# Altium PCB UI_PCB.PcbDoc (part 2 of 5)
Units mm, origin at the board's own origin, x right, y up, seen from the top; angles counter-clockwise.
Board outline 164.97 x 129.99 mm, 4 copper layers (SIG/PWR1, GND1, GNS2, SIG/PWR2), stack 1.18 mm thick; 237 components, 216 nets, 913 pads, 655 vias.
Unrouted connection lines stored in the file: 177.
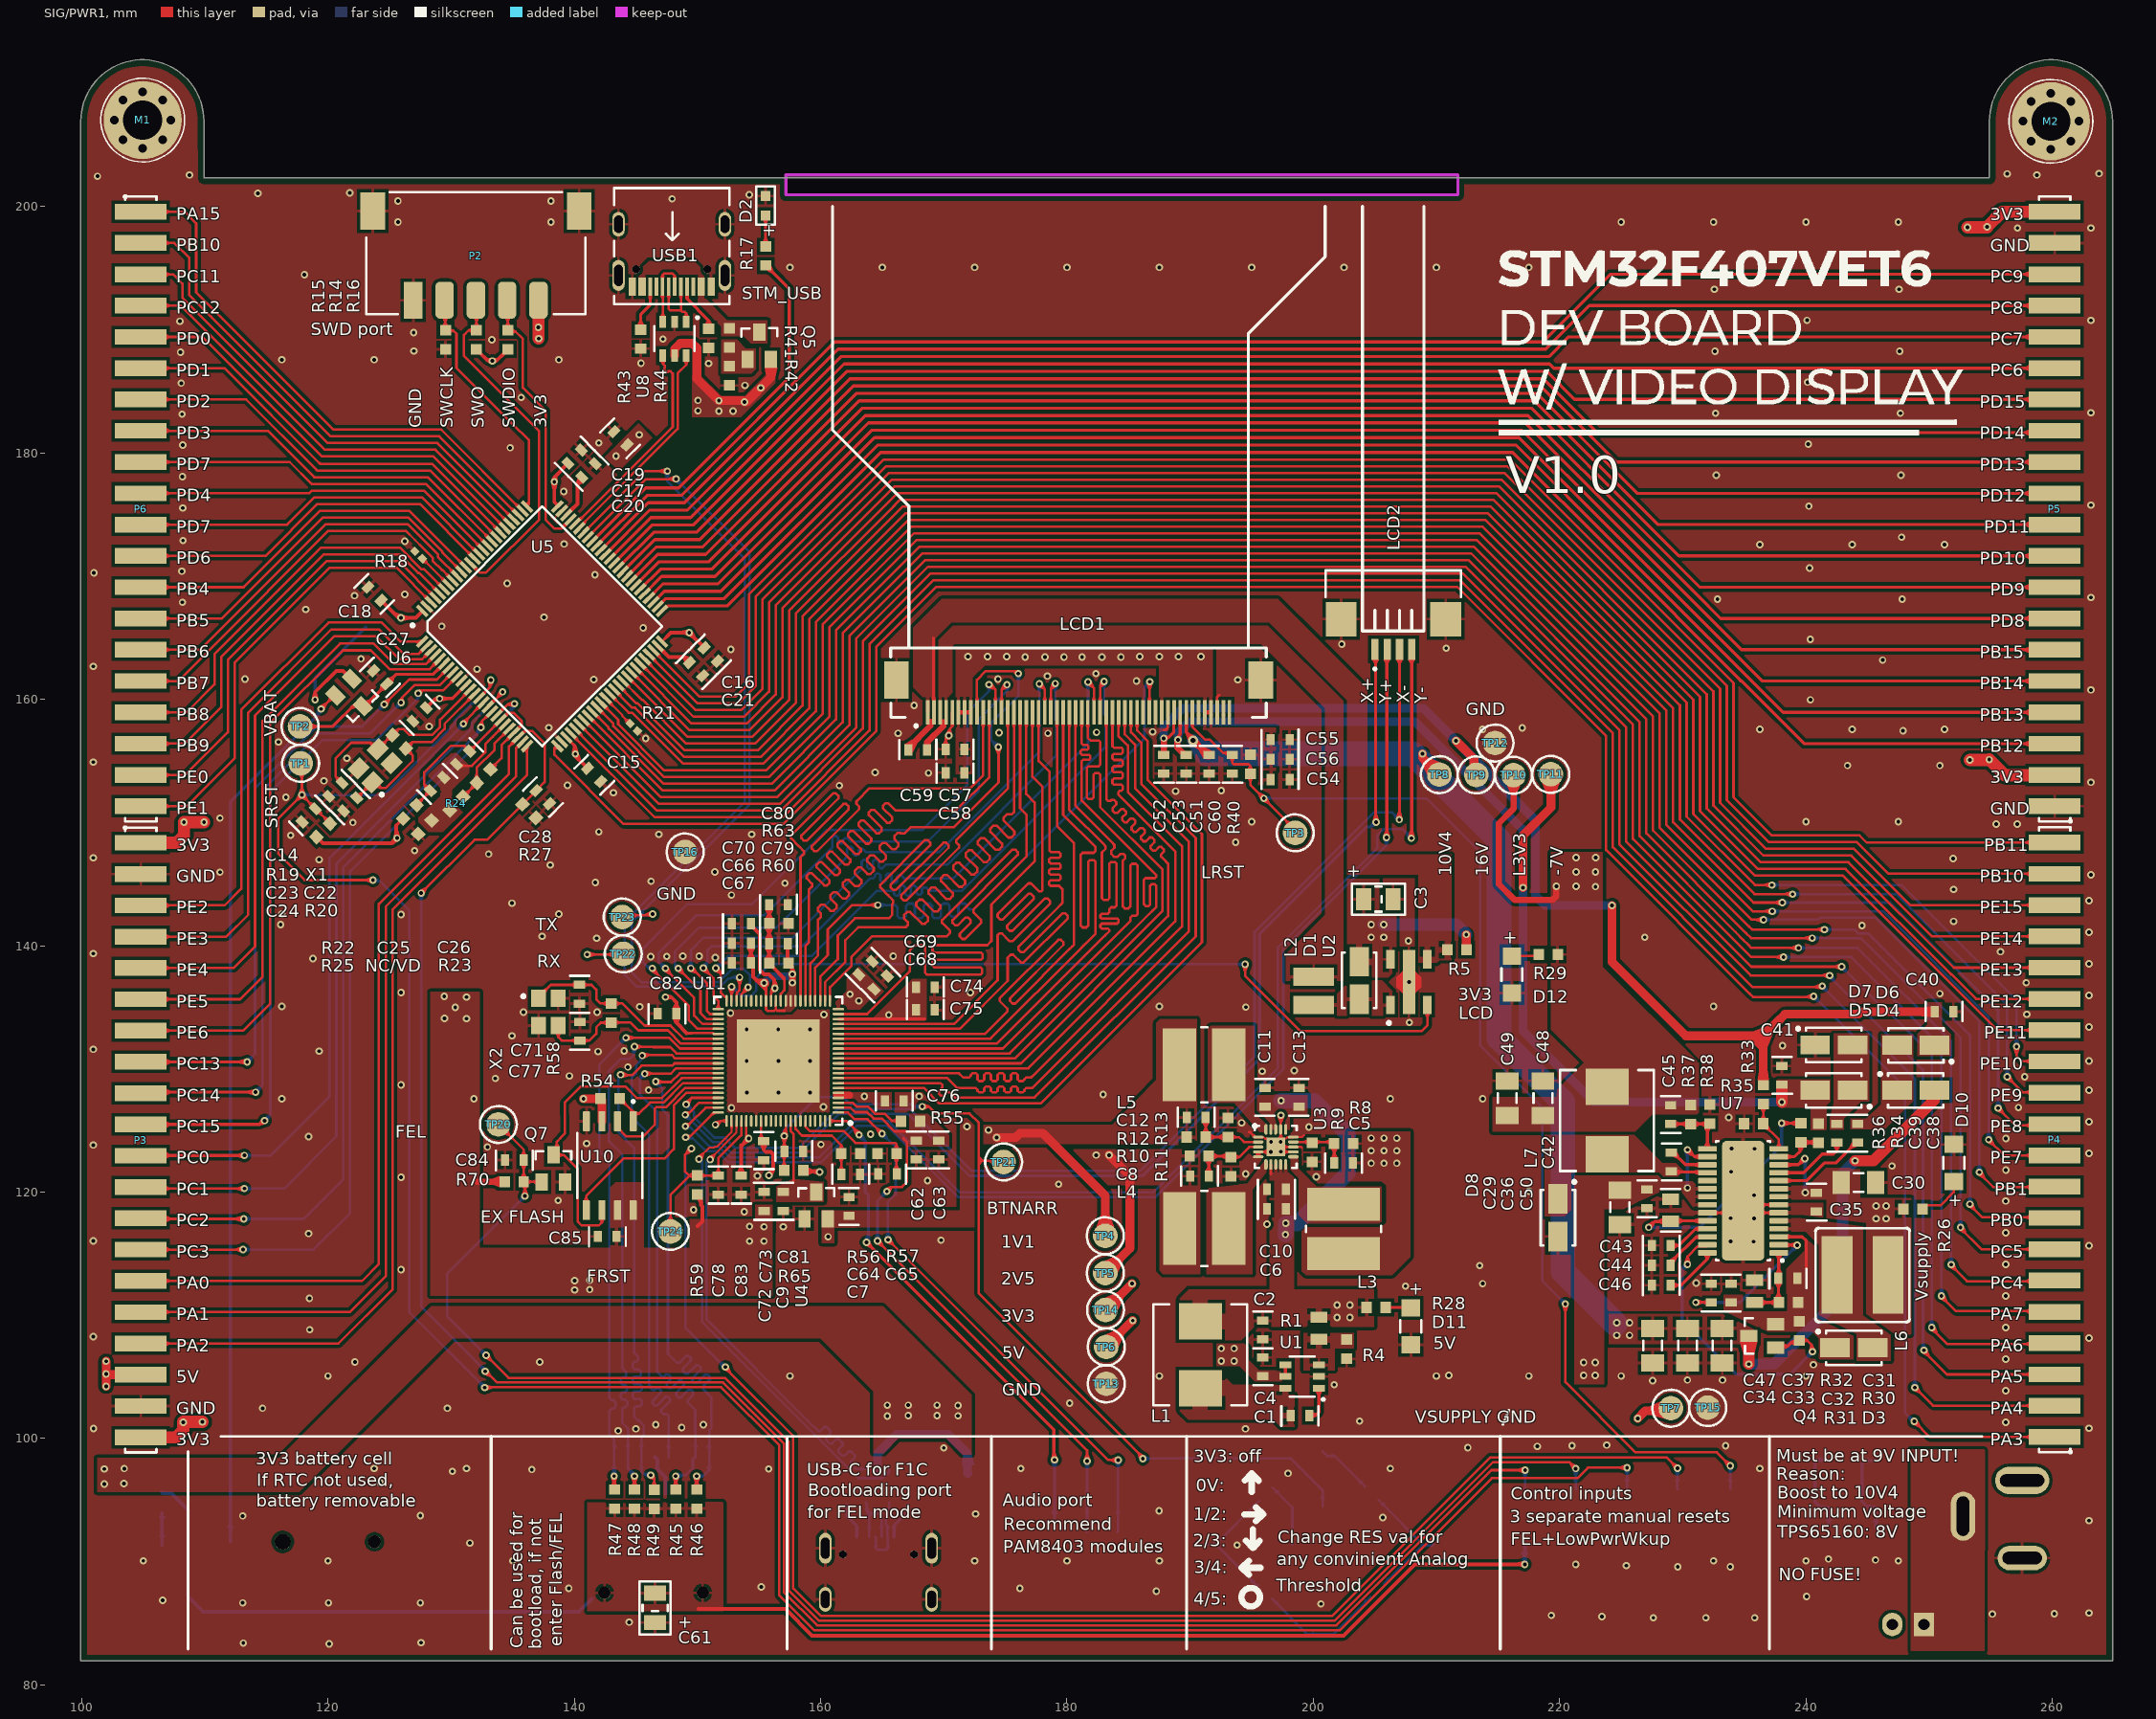
[diagram p0: SIG/PWR1 view]

## Via types
v1: diameter 0.6, hole 0.3, SIG/PWR1 to SIG/PWR2, tented both sides, 644 vias
v2: diameter 0.6, hole 0.3, SIG/PWR1 to SIG/PWR2, tented bottom, 10 vias
v3: diameter 0.8, hole 0.4, SIG/PWR1 to SIG/PWR2, tented both sides, 1 vias

## Nets (pads, with @x,y where several pads share a name; then routed paths per layer and width w, separated by ;. In a path a pad name is that pad's centre, name@x,y a point inside that pad or via, vN(x,y) a via of type N, cw(c..) or ccw(c..) an arc to the next point about the centre after c; other vN are vias at no path point) (continued)
3V3: (continued)
  SIG/PWR1 w0.308: v1(147.396,135.839) 147.398,135.837 147.856,135.837 148.285,135.407 C82.2@148.285,134.493 148.291,134.487 148.291,133.75 149.132,132.909 ; R59.2@149.987,119.811 150.012,119.811 150.283,119.54 150.283,118.961 150.384,118.86 150.384,117.618 150.012,117.246 ; 150.089,86.157 157.148,86.157 159.304,84.001 202.441,84.001 208.229,89.789 v1(217.17,89.789) ; C73.2@155.372,124.13 155.372,123.447 155.552,123.266 155.956,123.266 156.137,123.086 156.137,121.773 155.804,121.44 v1(155.804,121.361) ; R65.2@158.585,121.768 158.656,121.696 159.863,121.696 v1(159.918,121.641)
  SIG/PWR1 w0.512: 132.105,120.853 R70.2@134.34,120.853
  SIG/PWR1 w0.58: 161.29,127.864 162.341,127.864
  SIG/PWR1 w0.712: v1(140.741,127.584) 142.1,127.584 R54.2@142.125,127.61 142.125,127.585 142.24,127.47 U10.3@142.24,125.754 ; TP14.1@183.134,110.439 185.268,112.573 v1(185.293,112.573)
  SIG/PWR2 w0.308: R39.1@106.528,95.644 106.586,95.585 107.259,95.585 108.636,94.209 108.636,87.173 109.855,85.954 140.386,85.954 141.427,86.995 ; SD1.4@146.546,98.479 146.742,98.283 146.742,97.504 147.396,96.85 147.396,95.549 ; v1(217.17,89.789) SW2.2@217.17,91.415
  other v1: 140.03,112.065 141.249,112.09 140.03,112.827 141.249,112.852 154.229,116.027 155.397,116.021 160.604,116.383 155.397,117.196 154.229,117.221 204.699,122.352 205.74,122.352 206.781,122.352 204.699,123.368 205.74,123.368 206.781,123.368 204.699,124.384 205.74,124.384 206.781,124.384 171.882,125.324 131.851,127.584 163.551,127.781 131.242,134.087 129.464,134.112 165.532,134.391 130.327,135.001 131.242,135.839 129.438,135.89